# Altium PCB PCB.PcbDoc
Units mil, origin at the board's own origin, x right, y up, seen from the top; angles counter-clockwise.
Board outline 2500 x 2500 mil, 2 copper layers (Top Layer, Bottom Layer); 22 components, 38 nets, 98 pads, 62 vias.
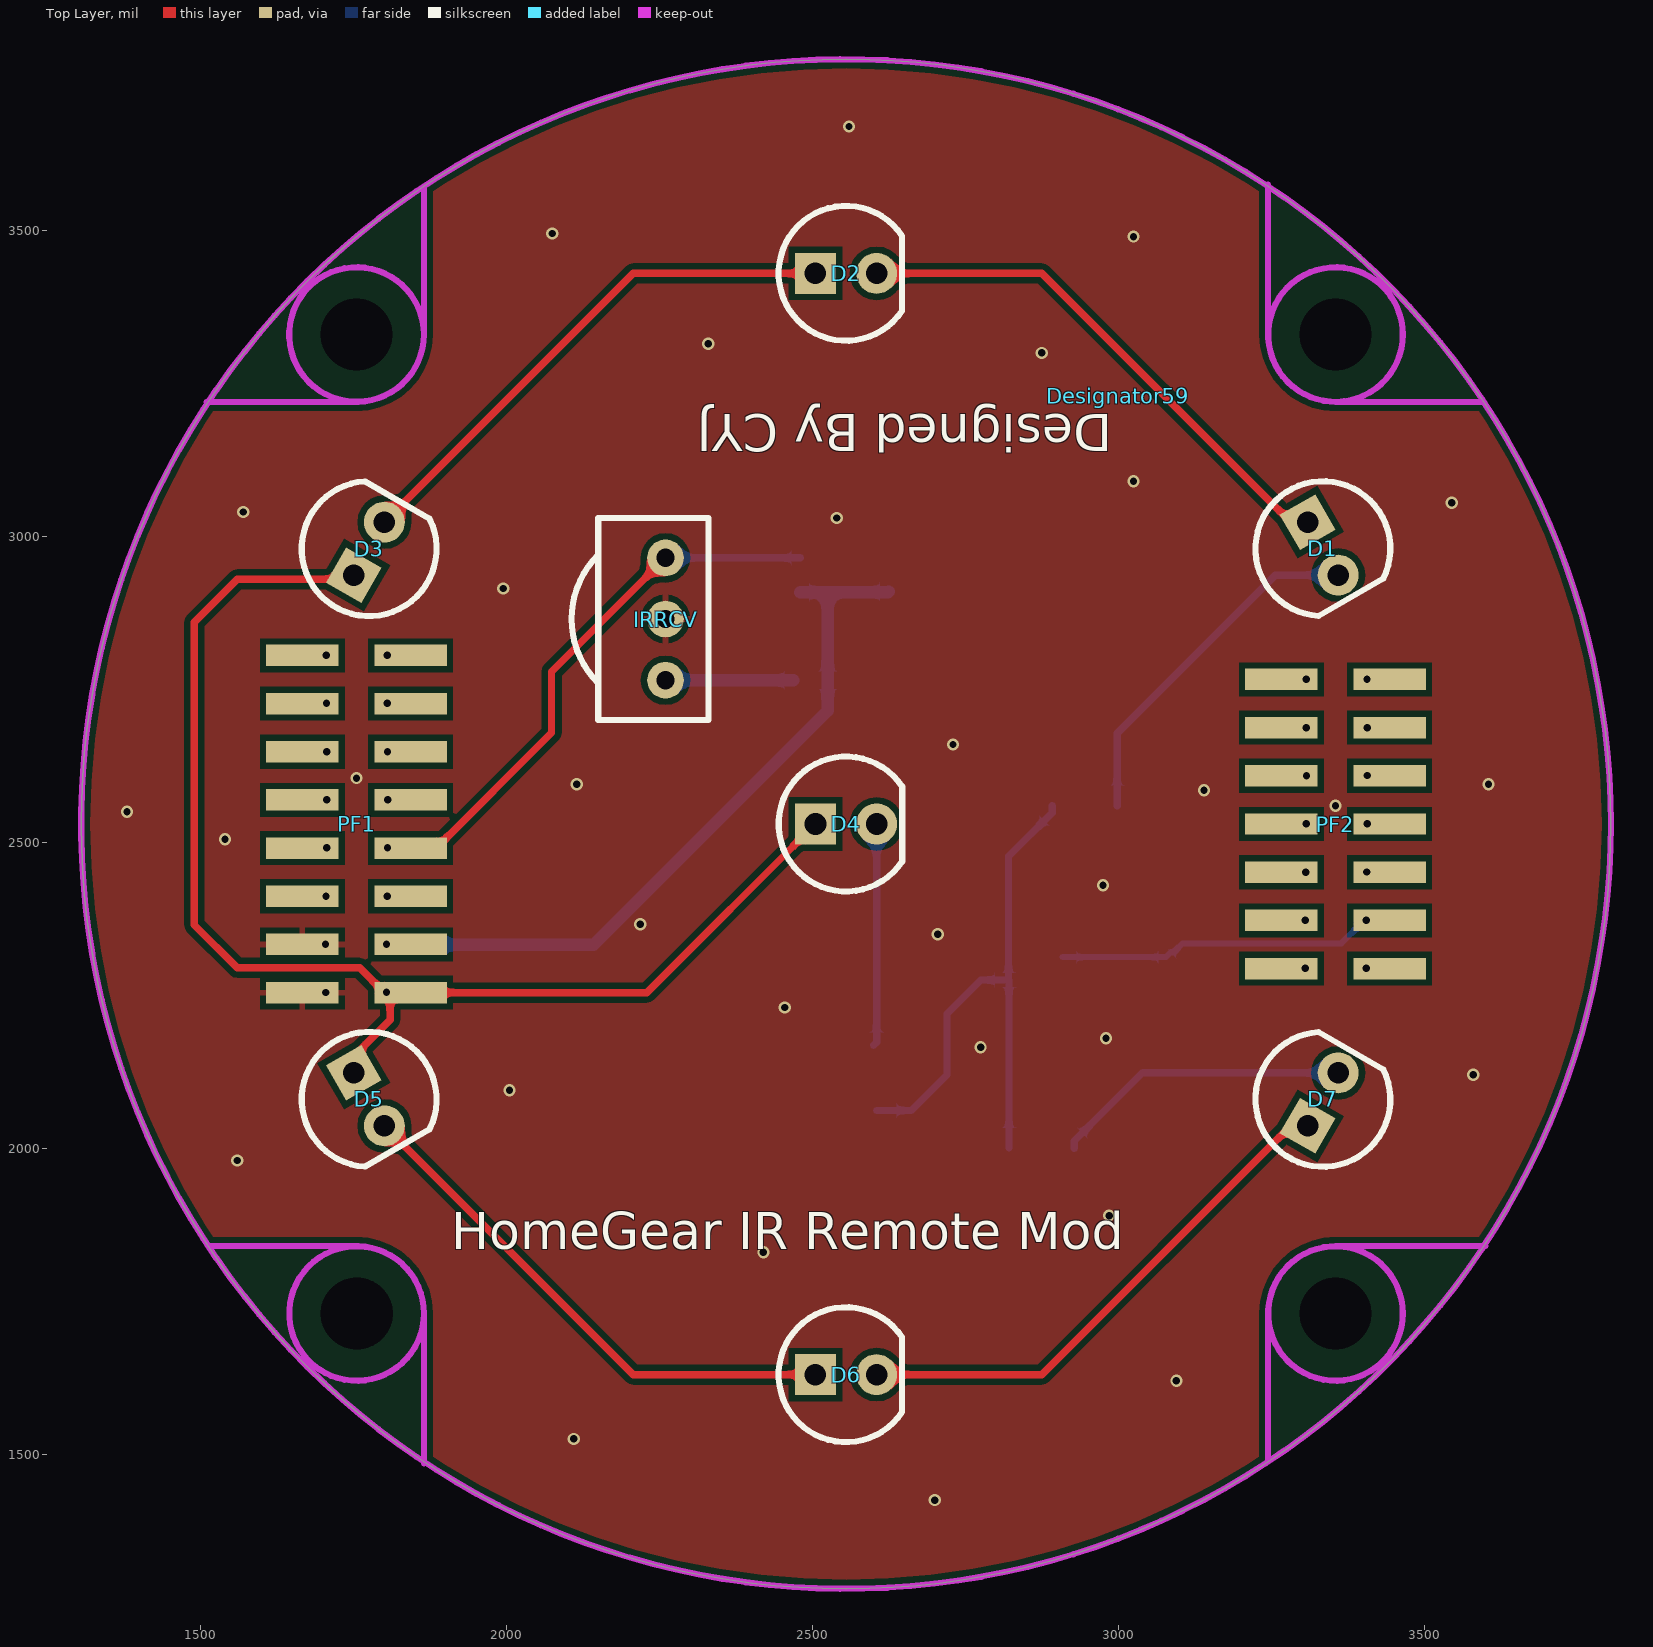
[diagram p0: Top Layer view]
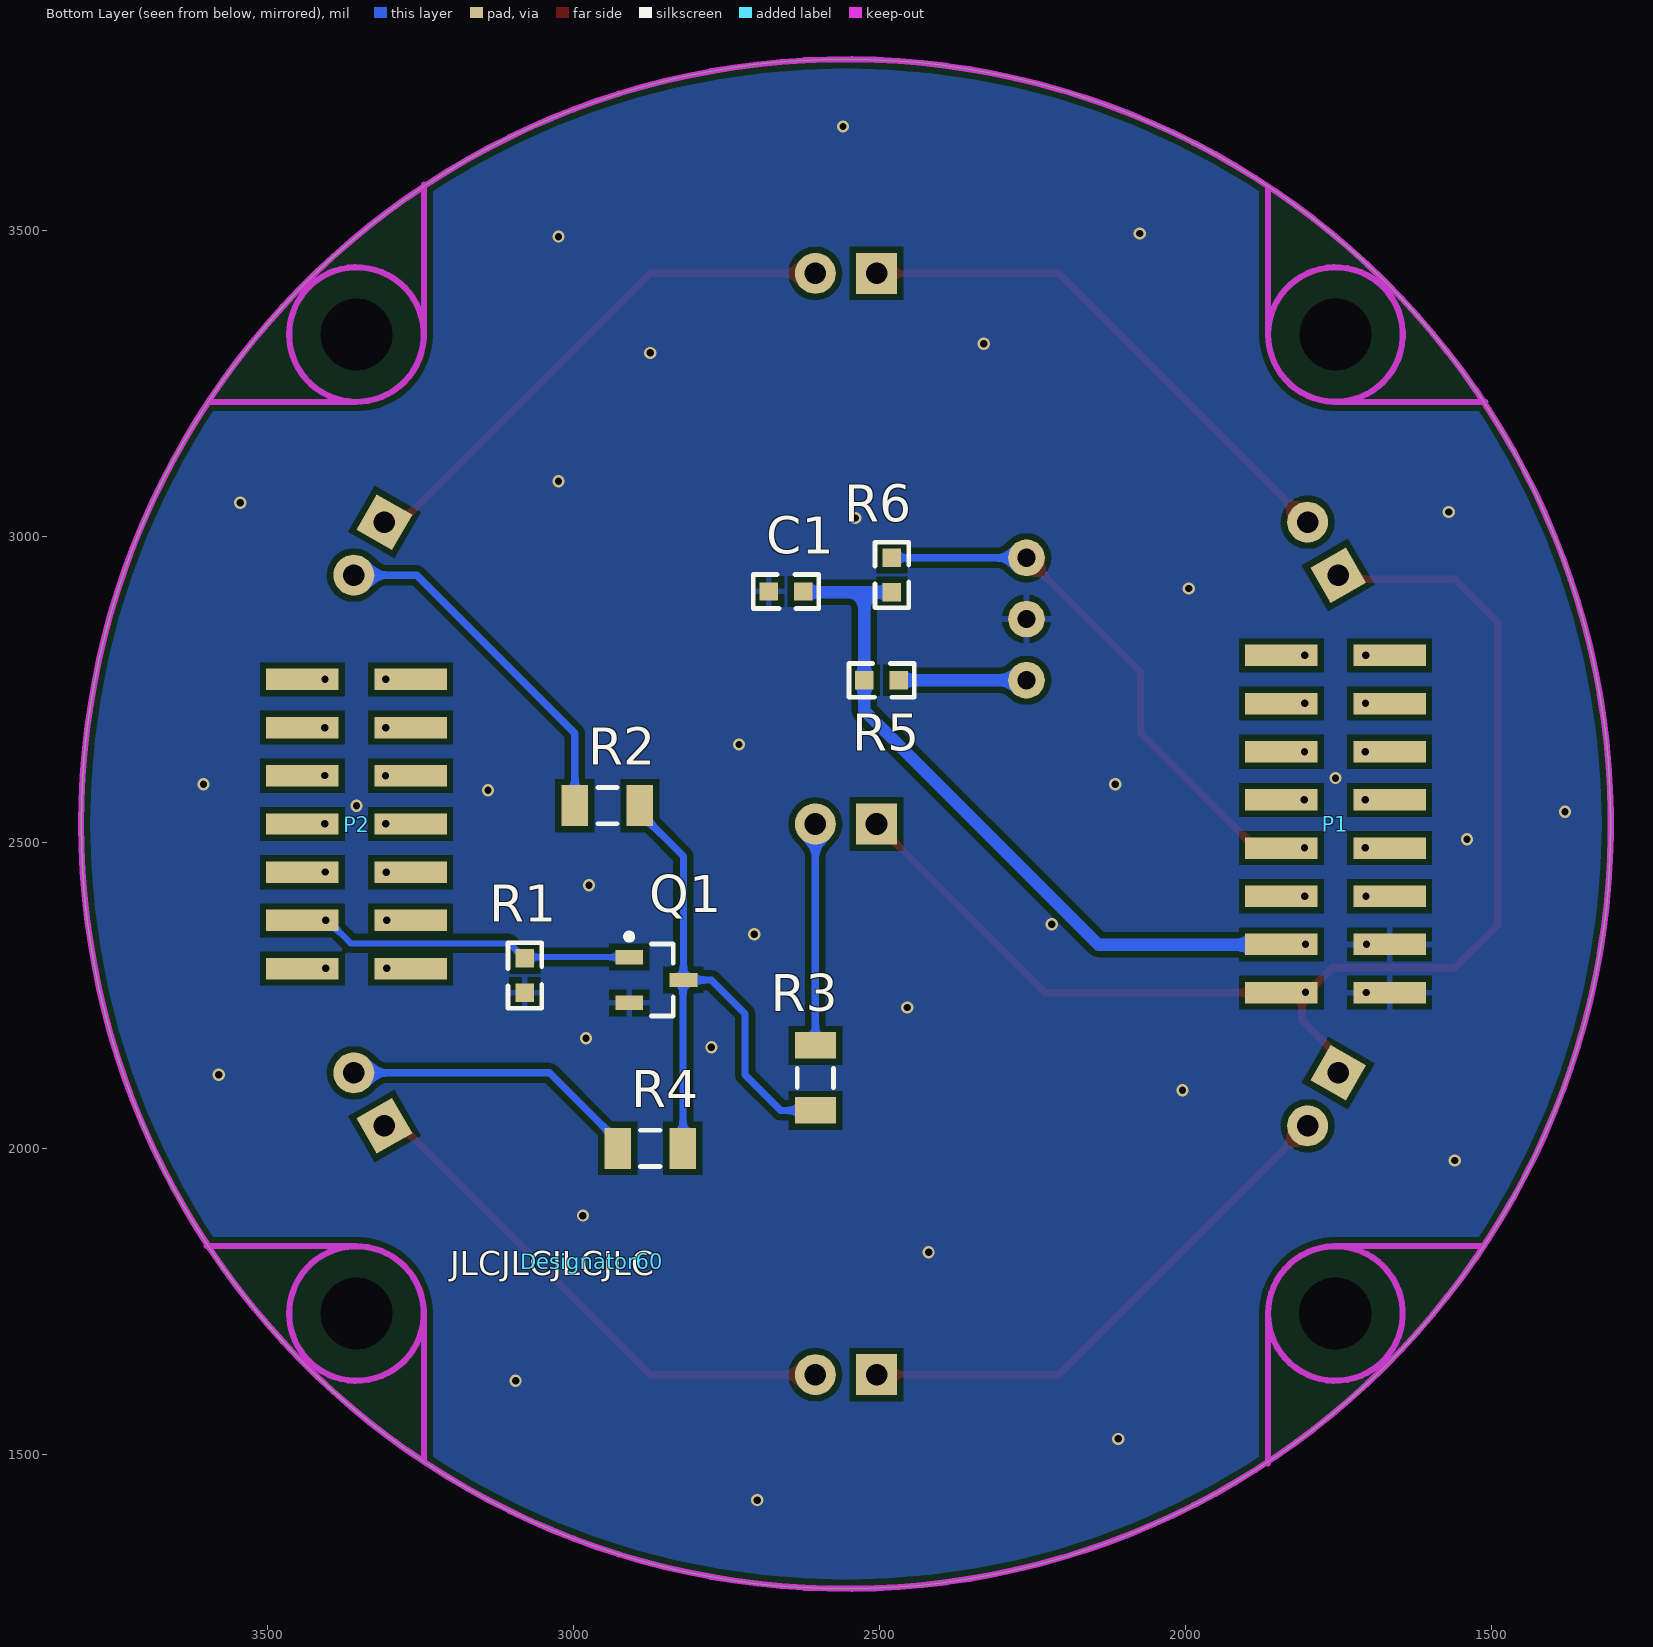
[diagram p1: Bottom Layer view, seen from below]
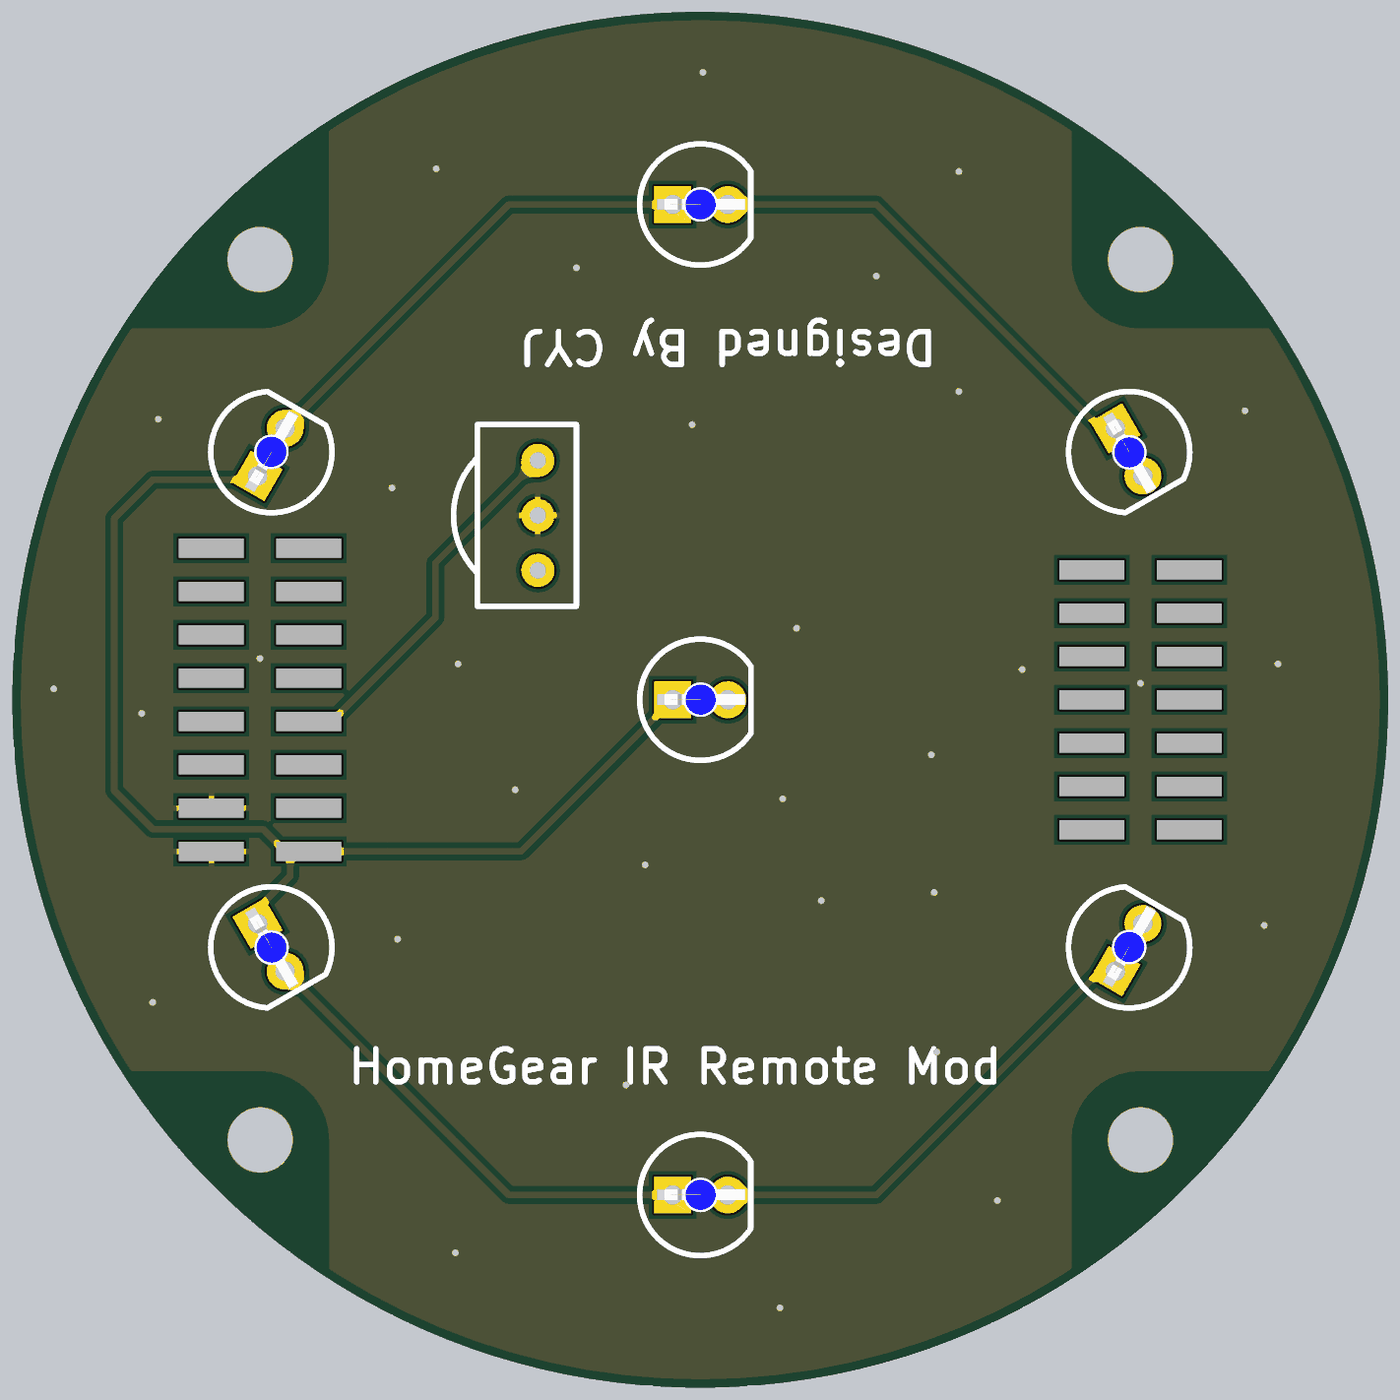
[diagram p2: 3D render of the assembled board from above, using the file's embedded part models]

## Layer stack, top to bottom
Top Solder: solder mask 0.4, Solder Resist, Dk 3.5
Top Layer: signal copper 1.4
Dielectric 1: dielectric 12.6, FR-4, Dk 4.8
Bottom Layer: signal copper 1.4
Bottom Solder: solder mask 0.4, Solder Resist, Dk 3.5

## Board outline
1305,2530 ccw(c2555,2530) 2555,1280 ccw(c2555,2530) 3805,2530 ccw(c2555,2530) 2555,3780 ccw(c2555,2530)

## Design rules (kind name [scope] priority, off if disabled: settings)
Clearance [All] p1: gap=10 ignorepadtopadclearanceinfootprint=FALSE except(0: Arc-Hole Track-Hole SMDPad-Hole THPad-Hole Via-Hole Fill-Hole Poly-Hole Region-Hole Text-Hole)
PolygonConnect [All] p1: thpad.connectstyle=Relief thpad.reliefconductorwidth=10 thpad.reliefentries=4 thpad.polygonreliefangle="90 Angle" thpad.airgapwidth=10 smdpad.connectstyle=Relief smdpad.reliefconductorwidth=10 smdpad.reliefentries=4 smdpad.polygonreliefangle="90 Angle" smdpad.airgapwidth=10 via.connectstyle=Direct via.reliefconductorwidth=10 via.reliefentries=4 via.polygonreliefangle="90 Angle" via.airgapwidth=10
RoutingVias [All] p1: holewidth=28 width=50 viastyle="Through Hole" minholewidth=28 minwidth=50 maxholewidth=28 maxwidth=50
SolderMaskExpansion [All] p1: expansion=4 istentingtop=FALSE
Width [All] p1: maxlimit=90 minlimit=10 preferedwidth=10 minimp=50.000000 maximp=50.000000 favimp=50.000000
30 further rules are at their usual default settings.

## Classes and differential pairs
component class Sheet: C1 D1 D2 D3 D4 D5 D6 D7 IRRCV P1 P2 PF1 PF2 Q1 R1 R2 R3 R4 R5 R6

## Components (designator, comment, footprint, x,y, rotation, side; value= is the part's Value field where it differs from the comment)
C1 "Cap" MY0603 2650.8,2910 r180 bottom value=0.1uF
D1 "LED0" "LED 5MM-B" 3334.42,2980 r300 top
D2 "LED0" "LED 5MM-B" 2555,3430 r0 top
D3 "LED0" "LED 5MM-B" 1775.58,2980 r60 top
D4 "LED0" "LED 5MM-B" 2555.13,2530 r0 top locked
D5 "LED0" "LED 5MM-B" 1775.58,2080 r300 top
D6 "LED0" "LED 5MM-B" 2555,1630 r0 top
D7 "LED0" "LED 5MM-B" 3334.42,2080 r60 top
Designator59 "Comment" DesignedByCYJ 3000,3230 r180 top
Designator60 "Comment" JLC_CLI_NO 2970,1815 r180 bottom
IRRCV "IR_RCV" 1838IRrcv 2260,2865 r90 top
P1 "Header 8X2" SMD_PIN_HDR8x2_2.0MM 1755,2530 r270 bottom locked
P2 "Header 7X2" SMD_PIN_HDR7x2_2.0MM 3355,2530 r270 bottom locked
PF1 "Header 8X2" SMD_FEM_HDR8x2_2.0MM 1755,2530 r270 top
PF2 "Header 7X2" SMD_FEM_HDR7x2_2.0MM 3355,2530 r270 top
Q1 "AO3400A" SOT-23B_N 2865,2275 r180 bottom
R1 "Res2" My0603 3080,2280 r270 bottom value=10K
R2 "Res2" My1206 2945,2560 r180 bottom value=10R
R3 "Res2" My1206 2605,2115 r270 bottom value=50R
R4 "Res2" My1206 2875,2000 r180 bottom value=10R
R5 "Res2" My0603 2494.56,2764.89 r180 bottom value=100
R6 "Res2" My0603 2480,2939.2 r90 bottom value=>20K

## Footprints (in the part's own frame and the unit in brackets; to place one, negate y for a bottom-side part, rotate by r counter-clockwise, add the part's x,y. Pads: shape width x height; smd on the part's side, far side on the other; paste and mask are expansions set on the pad)
1838IRrcv [mil]
  round 60 hole 30: 1(-100,0) 2(0,0) 3(100,0)
  silkscreen extent -165,-70 165,153
DesignedByCYJ [mil]
JLC_CLI_NO [mil]
"LED 5MM-B" [mm] "蓝色5mm直插LED                                     淘宝ID:黄晶宝石"
  rect 1.7x1.7 hole 0.9: 1(-1.27,0)
  round 1.7 hole 0.9: 2(1.27,0)
  silkscreen extent -2.8,-2.8 2.33,2.8, body extent -2.85,-2.85 2.45,2.85, height 8.75
MY0603 [mil]
  rect 30x30 smd: 1(-30.44,0.11) 2(25.8,0)
  silkscreen extent -56,-28 51,28, body extent -34,-16 29,16, height 18
My0603 [mil]
  rect 30x30 smd: 1(-30.44,0.11) 2(25.8,0)
  silkscreen extent -56,-28 51,28, body extent -34,-16 29,16, height 18
My1206 [mm]
  rect 1.1x1.7 smd: 1(-1.35,0) 2(1.35,0)
  silkscreen extent -0.4,-0.75 0.4,0.75
SMD_FEM_HDR7x2_2.0MM [mm]
  rect 0.89x3 smd: 1(-6,-2.25) 2(-6,2.25) 3(-4,-2.25) 4(-4,2.25) 5(-2,-2.25) 6(-2,2.25) 7(0,-2.25) 8(0,2.25) 9(2,-2.25) 10(2,2.25) 11(4,-2.25) 12(4,2.25) 13(6,-2.25) 14(6,2.25)
SMD_FEM_HDR8x2_2.0MM [mm]
  rect 0.89x3 smd: 1(-7,-2.25) 2(-7,2.25) 3(-5,-2.25) 4(-5,2.25) 5(-3,-2.25) 6(-3,2.25) 7(-1,-2.25) 8(-1,2.25) 9(1,-2.25) 10(1,2.25) 11(3,-2.25) 12(3,2.25) 13(5,-2.25) 14(5,2.25) 15(7,-2.25) 16(7,2.25)
SMD_PIN_HDR7x2_2.0MM [mm]
  rect 0.89x3 smd: 1(-6,2.25) 2(-6,-2.25) 3(-4,2.25) 4(-4,-2.25) 5(-2,2.25) 6(-2,-2.25) 7(0,2.25) 8(0,-2.25) 9(2,2.25) 10(2,-2.25) 11(4,2.25) 12(4,-2.25) 13(6,2.25) 14(6,-2.25)
SMD_PIN_HDR8x2_2.0MM [mm]
  rect 0.89x3 smd: 1(-7,2.25) 2(-7,-2.25) 3(-5,2.25) 4(-5,-2.25) 5(-3,2.25) 6(-3,-2.25) 7(-1,2.25) 8(-1,-2.25) 9(1,2.25) 10(1,-2.25) 11(3,2.25) 12(3,-2.25) 13(5,2.25) 14(5,-2.25) 15(7,2.25) 16(7,-2.25)
SOT-23B_N [mm] "SOT23, 3-Leads, Body 2.9x1.3mm, Pitch 0.95mm, Lead Span 2.4mm, IPC Medium Density"
  rect 1.15x0.6 smd: 1(-1.125,0.95) 2(-1.125,-0.95) 3(1.125,0)
  silkscreen extent -1.25,-1.5 0.7,1.92, body extent -0.7,-1.5 0.7,1.5, height 1.14

## Part data
C1: "Capacitor", LatestRevisionDate=17-Jul-2002, LatestRevisionNote="Re-released for DXP Platform.", PackageDescription="Radial Cap, Thru-Hole; 2 Leads; 0.3 in Pin Spacing", PackageReference=RAD-0.3, Published=8-Jun-2000, Publisher="Altium Limited"
D1 D2 D3 D4 D5 D6 D7: "Typical INFRARED GaAs LED", LatestRevisionDate=08-Jul-2005, LatestRevisionNote="Mech Layer 1 removed.", PackageDescription="LED; 2 Leads", PackageReference=LED-0, Published=8-Jun-2000, Publisher="Altium Limited"
P1 PF1: "Header, 8-Pin, Dual row", LatestRevisionDate=17-Jul-2002, LatestRevisionNote="Re-released for DXP Platform.", Publisher="Altium Limited"
P2 PF2: "Header, 7-Pin, Dual row", LatestRevisionDate=17-Jul-2002, LatestRevisionNote="Re-released for DXP Platform.", Publisher="Altium Limited"
Q1: library part QNPN, "NPN Bipolar Transistor", LatestRevisionDate=29-May-2009, LatestRevisionNote="IPC-7351 Footprint Added.", PackageDescription="3-Pin SOT-23 Package 0.95 mm Pitch, 2.4 mm Lead Span", PackageReference=SOT-23B, PackageVersion=Aug-1999, Published=8-Jun-2000, Publisher="Altium Limited"
R1 R2 R3 R4 R5 R6: "Resistor", LatestRevisionDate=17-Jul-2002, LatestRevisionNote="Re-released for DXP Platform.", PackageDescription="Axial Device, Thru-Hole; 2 Leads; 0.4 in Pin Spacing", PackageReference=AXIAL-0.4, Published=8-Jun-2000, Publisher="Altium Limited"

## Free pads (board coordinates)
  round 0 hole 118.11: 2(1755,3330) 2(1755.21,1730) 2(3355,1730) 2(3355,3329.95)

## Via types
v1: diameter 20, hole 12, Top Layer to Bottom Layer, tented both sides, 32 vias
v2: diameter 18, hole 12, Top Layer to Bottom Layer, 30 vias

## Nets (pads, with @x,y where several pads share a name; then routed paths per layer and width w, separated by ;. In a path a pad name is that pad's centre, name@x,y a point inside that pad or via, vN(x,y) a via of type N, cw(c..) or ccw(c..) an arc to the next point about the centre after c; other vN are vias at no path point)
+3.3: C1.2 P1.14 PF1.14 R5.1 R6.1 | length 1179.3
  Bottom Layer w20: P1.14 1844.2,2332.53 2142.53,2332.53 2525,2715 2525,2908.76 ; R6.1 2525,2908.76 ; C1.2 2623.76,2908.76 2525,2908.76
  other v2: 1803.94,2333.46
+5: D3.1 D4.1 D5.1 P1.16 PF1.16 | length 2130.5
  Top Layer w12: D5.1 1753.93,2126.65 1753.93,2153.93 1810,2210 1810,2242.89 PF1.16@1821.52,2254.41 ; D3.1 1743.88,2930 1560,2930 1490,2860 1490,2365 1560.02,2294.98 1760.02,2294.98 1800.23,2254.77 v2(1804.05,2254.77) ; PF1.16@1804.05,2254.41 PF1.16@1821.52,2254.41 ; D4.1 2229.53,2254.41 PF1.16 PF1.16@1821.52,2254.41
  Bottom Layer w20: D5.1 D5.1@1758.3,2123.3
CS1: P2.7 PF2.7
  other v2: 3307.37,2530.49
GND: C1.1 IRRCV.2 P1.13 P1.15 PF1.13 PF1.15 Q1.2 R1.2
  other v1: 2700,1425 2110,1525 3095,1620 2420,1830 2985,1890 1560,1980 2005,2095 3580,2120 2775,2165 2980,2180 2455,2230 2705,2350 2218.71,2366.29 2975,2430 1540,2505 1380,2550 3355,2560 3140,2585 2115,2595 3605,2595 1755,2605 2730,2660 1995,2915 2540,3030 1570,3040 3545,3055 3025,3090 2875,3300 2330,3315 3025,3490 2075,3495 2560,3670
  other v2: 1704.51,2254.69 1704.39,2333.38
IO0: P2.11 PF2.11
  other v2: 3305.61,2372.8
IO2: P2.14 PF2.14
  other v2: 3405.27,2294.2
IO4: P2.12 PF2.12 Q1.1 R1.1 | length 559.2
  Bottom Layer w10: Q1.1 3077.92,2312.4 3085.96,2320.44 3090.83,2320.44 3105.39,2335 3364.53,2335 3402.05,2372.52 P2.12
  other v2: 3405.16,2372.89
IO12: P1.11 PF1.11
  other v2: 1705.03,2411.82
IO13: P1.12 PF1.12
  other v2: 1805.03,2412.09
IO14: IRRCV.3 P1.10 PF1.10 R6.2 | length 891.2
  Top Layer w12: PF1.10 1885.12,2490.63 2073.73,2679.24 2073.73,2778.73 IRRCV.3
  Bottom Layer w12: IRRCV.3 R6.2
  other v2: 1805.69,2491.15
IO15: P2.13 PF2.13
  other v2: 3305.73,2294.11
IO25: P1.7 PF1.7
  other v2: 1706.31,2569.67
IO26: P1.8 PF1.8
  other v2: 1805.85,2569.76
IO27: P1.9 PF1.9
  other v2: 1706.15,2491.07
IO32: P1.5 PF1.5
  other v2: 1706.15,2647.96
IO33: P1.6 PF1.6
  other v2: 1805.69,2648.05
IO34: P1.3 PF1.3
  other v2: 1705.83,2727.21
IO35: P1.4 PF1.4
  other v2: 1805.37,2727.29
MISO: P2.5 PF2.5
  other v2: 3307.53,2609.1
MOSI: P2.2 PF2.2
  other v2: 3406.59,2766.72
NetD1_1: D1.1 D2.2 | length 872.9
  Top Layer w12: D2.2 2875,3430 3281.7,3023.3 D1.1
NetD1_2: D1.2 R2.1 | length 586.5
  Bottom Layer w12: R2.1 2998.15,2678.15 3256.7,2936.7 D1.2
NetD2_1: D2.1 D3.2 | length 872.9
  Top Layer w12: D3.2 2207.28,3430 D2.1
NetD4_2: D4.2 R3.1 | length 364
  Bottom Layer w12: R3.1@2600,2168.15 2605,2173.15 2605,2529.87 D4.2
NetD5_2: D5.2 D6.1 | length 872.9
  Top Layer w12: D5.2 2207.28,1630 D6.1
NetD6_2: D6.2 D7.1 | length 872.9
  Top Layer w12: D6.2 2875,1630 3281.7,2036.7 D7.1
NetD7_2: D7.2 R4.1 | length 489.3
  Bottom Layer w12: R4.1 2928.15,2011.81 3039.64,2123.3 D7.2
NetIRRCV_1: IRRCV.1 R5.2 | length 208.8
  Bottom Layer w12: IRRCV.1 IRRCV.1@2260.05,2764.95 ; R5.2@2468.71,2764.95 R5.2
  Bottom Layer w20: IRRCV.1@2260.05,2764.95 R5.2@2468.71,2764.95
NetQ1_1: Q1.3 R2.2 R3.2 R4.2 | length 951.7
  Bottom Layer w12: R3.2 2661.85,2061.85 2720,2120 2720,2220 2775,2275 Q1.3 ; R4.2@2821.28,2000.57 2821.28,2274.43 Q1.3 ; R2.2 2891.85,2548.19 2820.71,2477.05 Q1.3
RXD0: P2.3 PF2.3
  other v2: 3307.37,2687.39
RXD1: P2.9 PF2.9
  other v2: 3306.25,2451.25
SCK: P2.8 PF2.8
  other v2: 3406.91,2530.58
SCL: P2.1 PF2.1
  other v2: 3307.05,2766.63
SDA: P2.6 PF2.6
  other v2: 3407.07,2609.18
SENSOR_VN: P1.2 PF1.2
  other v2: 1805.21,2805.9
SENSOR_VP: P1.1 PF1.1
  other v2: 1705.67,2805.81
TXD0: P2.4 PF2.4
  other v2: 3406.91,2687.47
TXD1: P2.10 PF2.10
  other v2: 3406.25,2451.51

## Polygon pours and split planes (outlines as drawn)
GND on Bottom Layer "NONET_L-01_P-001" (solid, remove dead copper, pour order 1): 1272.2,3816.16 1347.2,3891.16 3882.2,3891.16 3882.2,1371.16 3672.2,1161.16 1432.2,1161.16 1187.2,1406.16
GND on Top Layer "NONET_L-01_P-001" (solid, remove dead copper, pour order 2): 1270,3730 1345,3805 3880,3805 3880,1285 3670,1075 1430,1075 1185,1320

## Keep-outs
Keep-Out Layer:
  circle w10: c1755,3330 r110
  circle w10: c3355,3329.95 r110
  circle w10: c3355,1730 r110
  circle w10: c1755.21,1730 r110
  circle w10: c2555,2530 r1250
  lines w10: 1510.21,3220 1755,3220 ; 1515,1840 1755,1840 ; 1865,3330.21 1865,3570.21 ; 1865.21,1485.21 1865.21,1730 ; 3245,1489.79 3245,1729.79 ; 3245,3330 3245,3574.79 ; 3355,1840 3599.79,1840 ; 3355.21,3220 3595.21,3220

## Silkscreen, mask and mechanical layers (free items; w line width, h text height)
Top Overlay:
  text "HomeGear IR Remote Mod" at 1910,1835 h60
Mechanical 1:
  circle w10: c2555,2530 r1250

## Text inside footprints (layer, text, board x,y; h text height)
Designator59: Top Overlay "Designed By CYJ" at 2990,3200.01 h60 r180
Designator60: Bottom Overlay "JLCJLCJLCJLC" at 3202.13,1792.87 h39.37